# EAGLE board ConnTest (EAGLE 9.6.2)

Size 90.17 x 16.51 mm. Coordinates in mm from the lower left corner, seen from the top.
Outline: 0,0 0,16.51 90.17,16.51 90.17,0 0,0
Copper layers (1*16): Top 0.035mm / dielectric 1.5mm / Bottom 0.035mm
Design rules "default": minimum track width 6mil, minimum drill 0.35mm, track to track 6mil, track to pad 6mil, pad to pad 6mil, via to via 6mil, smd to smd 6mil, copper to edge 40mil, drill to drill 6mil, minimum pad ring 10mil, minimum via ring 8mil, stop-mask expansion 4mil, vias tented up to drill 0mil, thermal gap 10mil

## Footprints (pad centres in the part's own frame; a part is rotated, then mirrored left to right if it is on the bottom)
JX20-152-D1LT = drill 2.6 pad 3.81: GND1 -4.85,3.88; GND2 77.6,3.88 | drill 0.35 pad 0.61 square: P$1 0,0; P$2 1.94,0; P$3 3.88,0; P$4 5.82,0; P$5 7.76,0; P$6 9.7,0; P$7 11.64,0; P$8 13.58,0; P$9 15.52,0; P$10 17.46,0; P$11 19.4,0; P$12 21.34,0; P$13 23.28,0; P$14 25.22,0; P$15 27.16,0; P$16 29.1,0; P$17 31.04,0; P$18 32.98,0; P$19 34.92,0; P$20 36.86,0; P$21 38.8,0; P$22 40.74,0; P$23 42.68,0; P$24 44.62,0; P$25 46.56,0; P$26 48.5,0; P$27 50.44,0; P$28 52.38,0; P$29 54.32,0; P$30 56.26,0; P$31 58.2,0; P$32 60.14,0; P$33 62.08,0; P$34 64.02,0; P$35 65.96,0; P$36 67.9,0; P$37 69.84,0; P$38 71.78,0; P$39 72.75,1.94; P$40 70.81,1.94; P$41 68.87,1.94; P$42 66.93,1.94; P$43 64.99,1.94; P$44 63.05,1.94; P$45 61.11,1.94; P$46 59.17,1.94; P$47 57.23,1.94; P$48 55.29,1.94; P$49 53.35,1.94; P$50 51.41,1.94; P$51 49.47,1.94; P$52 47.53,1.94; P$53 45.59,1.94; P$54 43.65,1.94; P$55 41.71,1.94; P$56 39.77,1.94; P$57 37.83,1.94; P$58 35.89,1.94; P$59 33.95,1.94; P$60 32.01,1.94; P$61 30.07,1.94; P$62 28.13,1.94; P$63 26.19,1.94; P$64 24.25,1.94; P$65 22.31,1.94; P$66 20.37,1.94; P$67 18.43,1.94; P$68 16.49,1.94; P$69 14.55,1.94; P$70 12.61,1.94; P$71 10.67,1.94; P$72 8.73,1.94; P$73 6.79,1.94; P$74 4.85,1.94; P$75 2.91,1.94; P$76 0.97,1.94; P$77 0,3.88; P$78 1.94,3.88; P$79 3.88,3.88; P$80 5.82,3.88; P$81 7.76,3.88; P$82 9.7,3.88; P$83 11.64,3.88; P$84 13.58,3.88; P$85 15.52,3.88; P$86 17.46,3.88; P$87 19.4,3.88; P$88 21.34,3.88; P$89 23.28,3.88; P$90 25.22,3.88; P$91 27.16,3.88; P$92 29.1,3.88; P$93 31.04,3.88; P$94 32.98,3.88; P$95 34.92,3.88; P$96 36.86,3.88; P$97 38.8,3.88; P$98 40.74,3.88; P$99 42.68,3.88; P$100 44.62,3.88; P$101 46.56,3.88; P$102 48.5,3.88; P$103 50.44,3.88; P$104 52.38,3.88; P$105 54.32,3.88; P$106 56.26,3.88; P$107 58.2,3.88; P$108 60.14,3.88; P$109 62.08,3.88; P$110 64.02,3.88; P$111 65.96,3.88; P$112 67.9,3.88; P$113 69.84,3.88; P$114 71.78,3.88; P$115 72.75,5.82; P$116 70.81,5.82; P$117 68.87,5.82; P$118 66.93,5.82; P$119 64.99,5.82; P$120 63.05,5.82; P$121 61.11,5.82; P$122 59.17,5.82; P$123 57.23,5.82; P$124 55.29,5.82; P$125 53.35,5.82; P$126 51.41,5.82; P$127 49.47,5.82; P$128 47.53,5.82; P$129 45.59,5.82; P$130 43.65,5.82; P$131 41.71,5.82; P$132 39.77,5.82; P$133 37.83,5.82; P$134 35.89,5.82; P$135 33.95,5.82; P$136 32.01,5.82; P$137 30.07,5.82; P$138 28.13,5.82; P$139 26.19,5.82; P$140 24.25,5.82; P$141 22.31,5.82; P$142 20.37,5.82; P$143 18.43,5.82; P$144 16.49,5.82; P$145 14.55,5.82; P$146 12.61,5.82; P$147 10.67,5.82; P$148 8.73,5.82; P$149 6.79,5.82; P$150 4.85,5.82; P$151 2.91,5.82; P$152 0.97,5.82

## Placement (x,y rotation side)
E$1  [JX20-152-D1LT]  8.89,5.08 0 top

## Library data of the parts
E$1 = JX20_Conn